# Altium PCB PCB1.PcbDoc
Units mm, origin at the board's own origin, x right, y up, seen from the top; angles counter-clockwise.
Board outline 72.9 x 53.34 mm, 2 copper layers (Top Layer, Bottom Layer); 7 components, 8 nets, 55 pads, 0 vias.
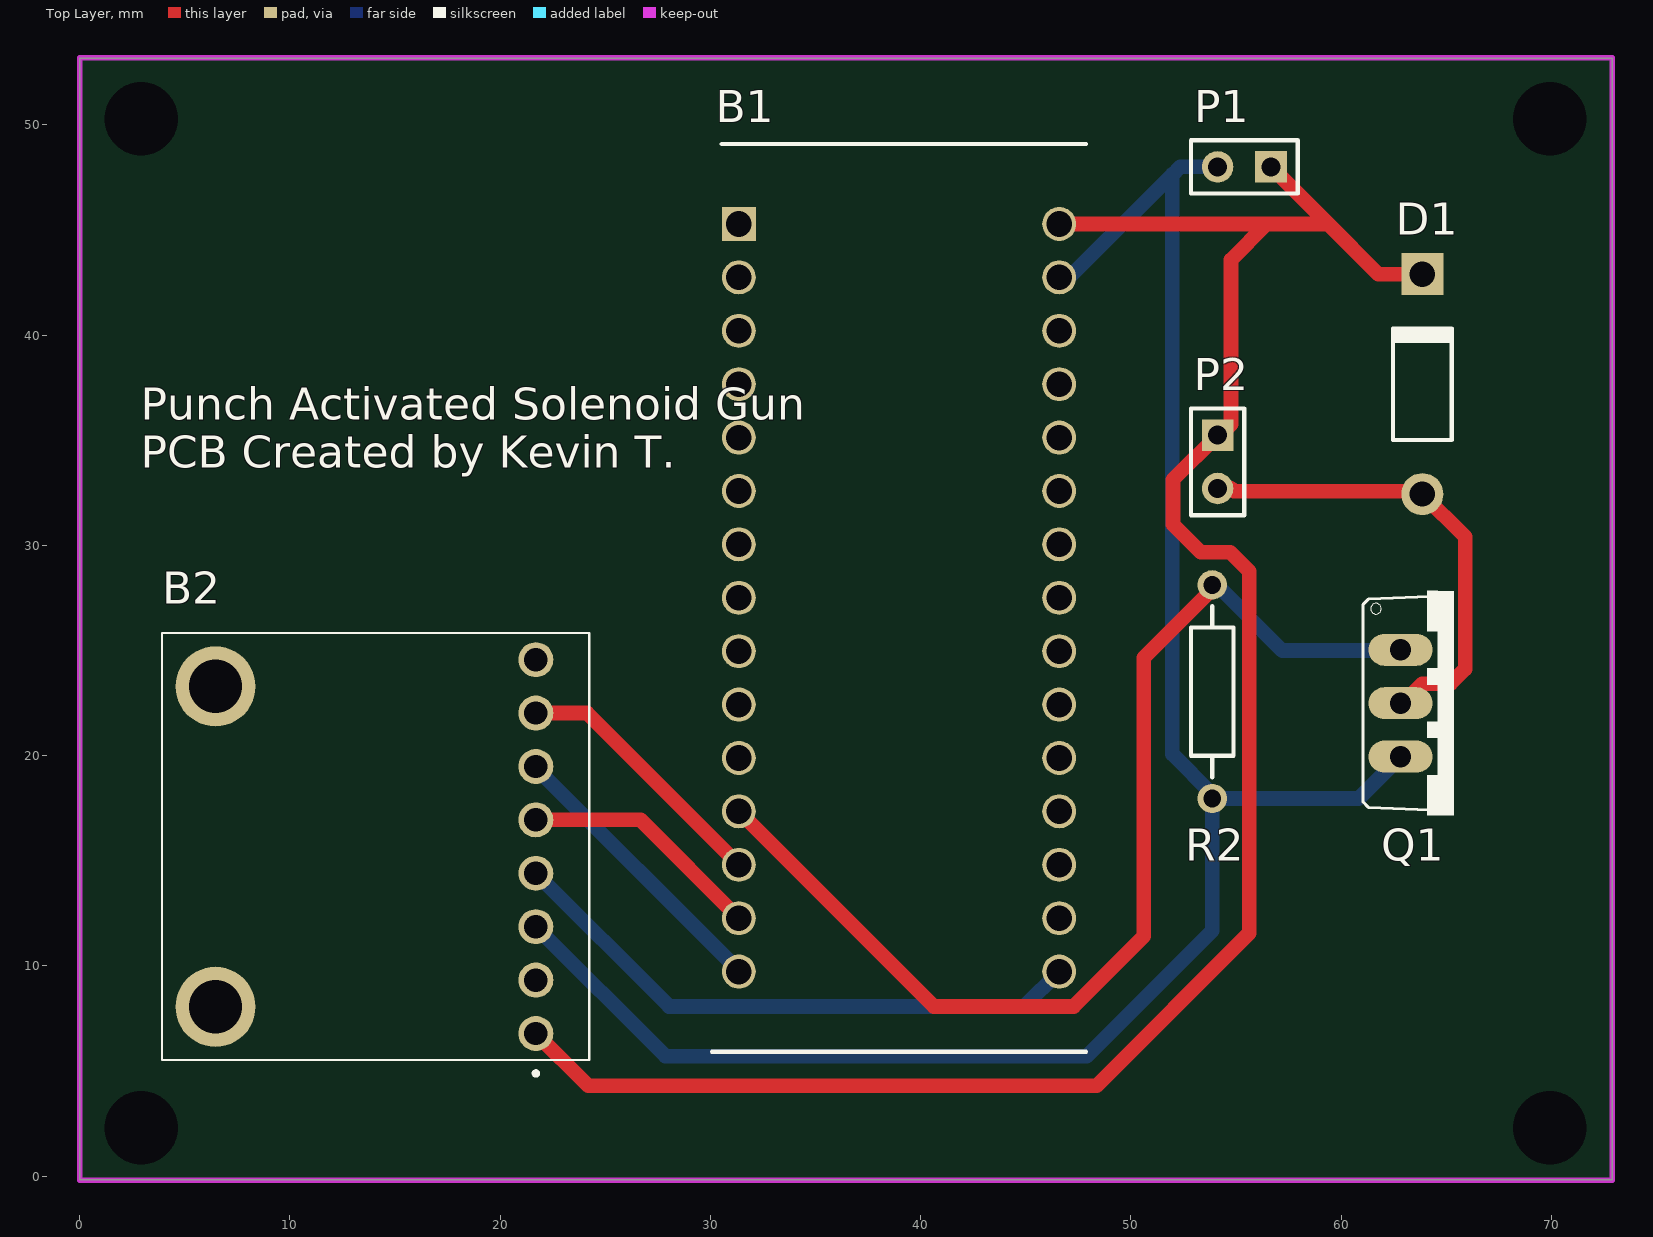
[diagram p0: Top Layer view]
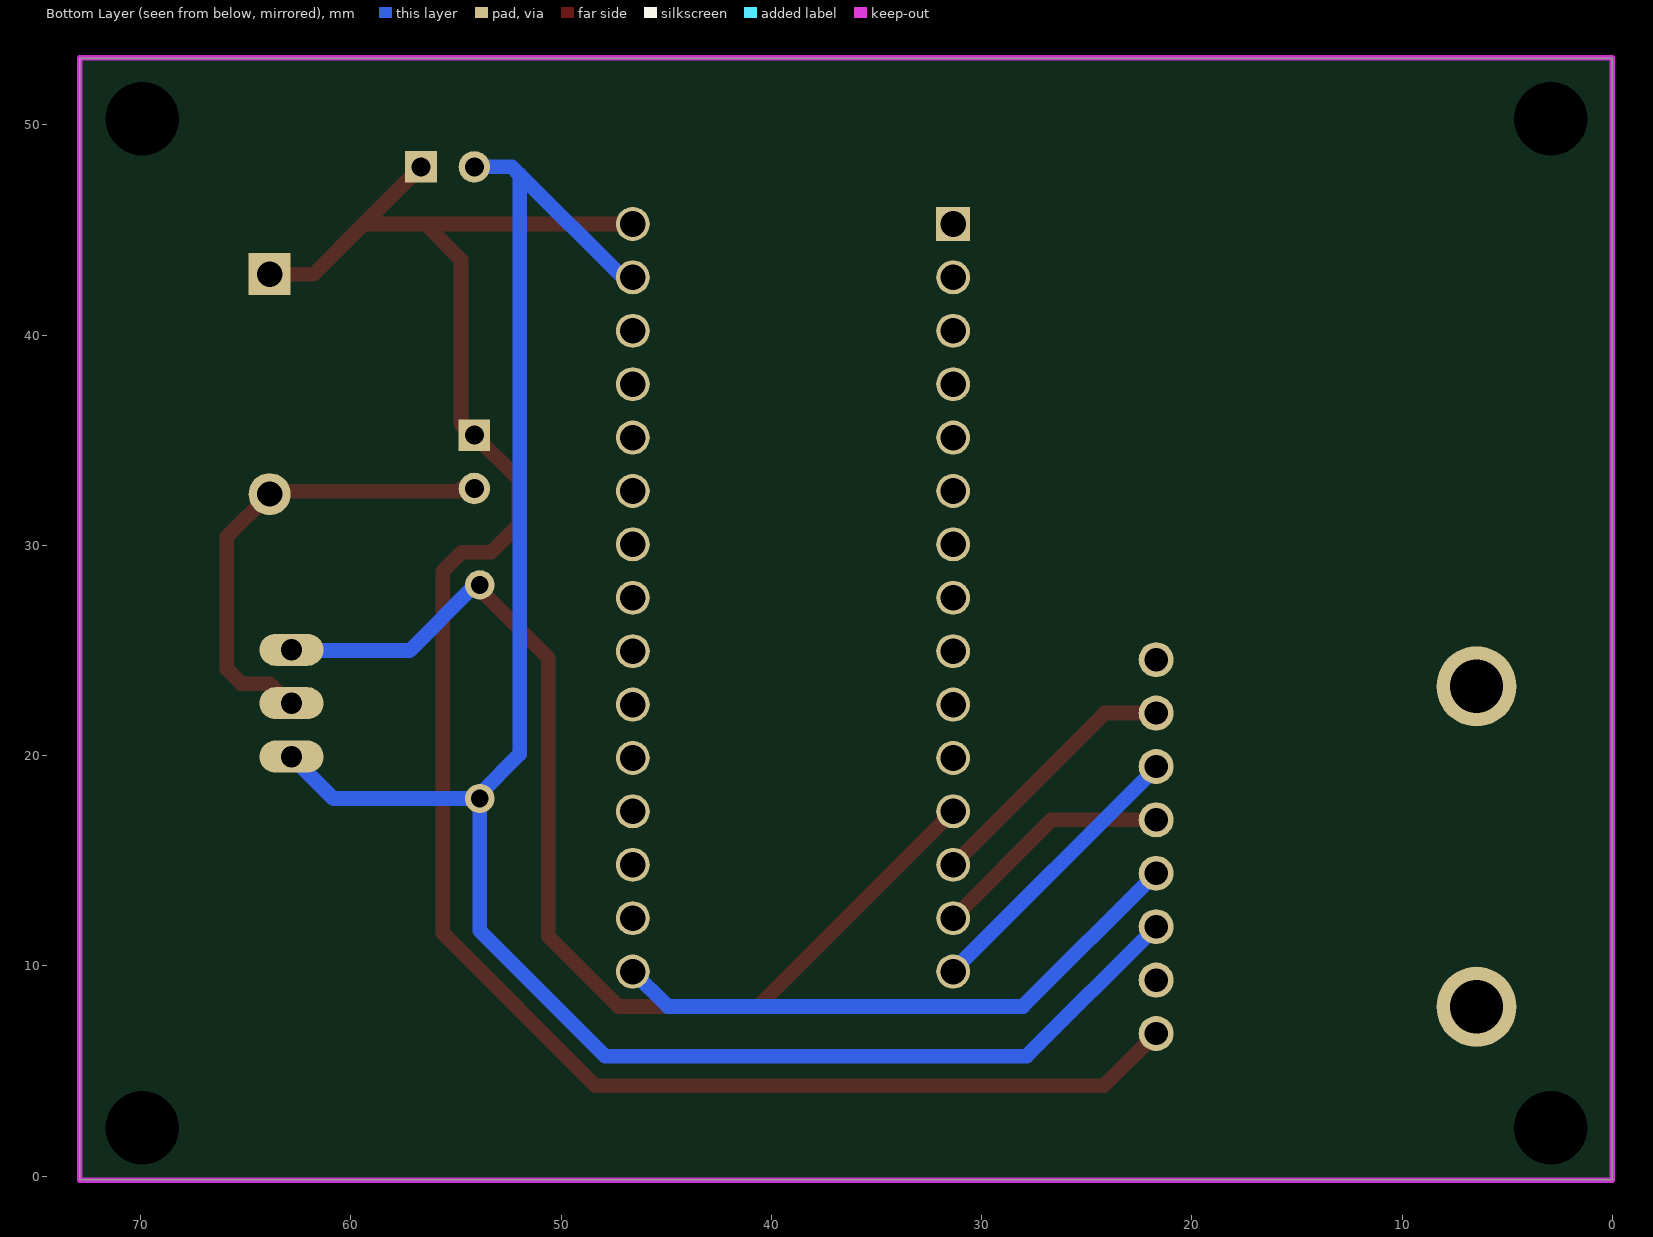
[diagram p1: Bottom Layer view, seen from below]

## Layer stack, top to bottom
Top Solder: solder mask 0.0102, Solder Resist, Dk 3.5
Top Layer: signal copper 0.0356
Dielectric 1: dielectric 0.32, FR-4, Dk 4.8
Bottom Layer: signal copper 0.0356
Bottom Solder: solder mask 0.0102, Solder Resist, Dk 3.5

## Board outline
0,-0.174 0,53.164 72.9,53.164 72.9,-0.174

## Design rules (kind name [scope] priority, off if disabled: settings)
Clearance [All] p1: gap=0.5 ignorepadtopadclearanceinfootprint=FALSE
HoleSize [All] p1: absolutevalues=TRUE maxlimit=10 minlimit=0.3 maxpercent=80.000 minpercent=20.000
PolygonConnect [All] p1: connectstyle=Relief reliefconductorwidth=0.5 reliefentries=4 polygonreliefangle="90 Angle" airgapwidth=0.5
RoutingVias [All] p1: holewidth=1 width=2.2 viastyle="Through Hole" minholewidth=0.6 minwidth=1.2 maxholewidth=0.7 maxwidth=1.7
SilkToSilkClearance [All] p1: silktosilkclearance=0.1
SilkToSolderMaskClearance [IsPad] p1: minsilkscreentomaskgap=0.1 clearancetoexposedcopper=TRUE
SolderMaskExpansion [All] p1: expansion=0.102
Width [All] p1: maxlimit=10 minlimit=0.5 preferedwidth=0.7
27 further rules are at their usual default settings.

## Components (designator, comment, footprint, x,y, rotation, side; value= is the part's Value field where it differs from the comment)
B1 "Nano" DIP1524W102P254L4318H762Q30N 38.972,27.51 r0 top
B2 "2809" 2809 21.7,6.786 r90 top
D1 "Diode 1N4007" DO-41 63.864,37.67 r90 top
P1 "LiPo Input" HDR1X2 56.664,48.005 r180 top
P2 "Solenoid Valve" HDR1X2 54.124,35.248 r270 top
Q1 "IRF520" TO220BV_IRF520(Primary) 65.364,22.494 r270 top
R2 "Res2" AXIAL-0.4 53.87,23.042 r90 top value=10K

## Footprints (in the part's own frame and the unit in brackets; to place one, negate y for a bottom-side part, rotate by r counter-clockwise, add the part's x,y. Pads: shape width x height; smd on the part's side, far side on the other; paste and mask are expansions set on the pad)
2809 [mm]
  round 1.665 hole 1.11: 1(0,0) 2(2.54,0) 3(5.08,0) 4(7.62,0) 5(10.16,0) 6(12.7,0) 7(15.24,0) 8(17.78,0)
  round 3.81 hole 2.54: MH1(1.27,15.24) MH2(16.51,15.24)
  silkscreen extent -2,-2.54 19.05,17.78, body extent -1.27,-2.54 19.05,17.78, height 5
AXIAL-0.4 [mm] "Axial Device, Thru-Hole; 2 Leads; 0.4 in Pin Spacing"
  round 1.4 hole 0.85: 1(-5.08,0) 2(5.08,0)
  silkscreen extent -4.06,-1.02 4.06,1.02
DIP1524W102P254L4318H762Q30N [mm]
  rect 1.616x1.616 / inner round 1.616 / far side rect 1.616x1.616 hole 1.216: 1(-7.62,17.78)
  round 1.616 hole 1.216: 2(-7.62,15.24) 3(-7.62,12.7) 4(-7.62,10.16) 5(-7.62,7.62) 6(-7.62,5.08) 7(-7.62,2.54) 8(-7.62,0) 9(-7.62,-2.54) 10(-7.62,-5.08) 11(-7.62,-7.62) 12(-7.62,-10.16) 13(-7.62,-12.7) 14(-7.62,-15.24) 15(-7.62,-17.78) 16(7.62,-17.78) 17(7.62,-15.24) 18(7.62,-12.7) 19(7.62,-10.16) 20(7.62,-7.62) 21(7.62,-5.08) 22(7.62,-2.54) 23(7.62,0) 24(7.62,2.54) 25(7.62,5.08) 26(7.62,7.62) 27(7.62,10.16) 28(7.62,12.7) 29(7.62,15.24) 30(7.62,17.78)
  silkscreen extent -8.89,-21.59 8.89,21.59, body extent -8.89,-21.46 8.89,21.72, height 7.62
DO-41 [mm] "Diode, Axial; Body 5.2 x 2.7 mm (LxDia. max), Lead Dia. 0.86 mm (max)"
  round 2 hole 1.2: 1(-5.23,0)
  rect 2x2 hole 1.2: 2(5.23,0)
  silkscreen extent -2.65,-1.4 2.75,1.4
HDR1X2 [mm] "Connector; Header; 2 Position"
  rect 1.5x1.5 hole 0.9: 1(0,0)
  round 1.5 hole 0.9: 2(2.54,0)
  silkscreen extent -1.27,-1.27 3.81,1.27
TO220BV_IRF520(Primary) [mil]
  oval 60x120 hole 40: D(0,-100) G(-100,-100) S(100,-100)
  silkscreen extent -210,-170 210,0

## Part data
B1: "Development Boards & Kits - AVR ARDUINO NANO V3 A000005", Manufacturer_Name=Arduino, Mouser Part Number=992-ARD-NANO30, RS Part Number=6961667, Allied_Number=70518857, Allied Price/Stock=http://www.alliedelec.com/arduino-a000005/70518857/, Datasheet Link=http://docs-emea.rs-online.com/webdocs/0db9/0900766b80db99cb.pdf, Geometry.Height=7.62mm, Manufacturer_Part_Number=Nano, Mouser Price/Stock=http://www.mouser.com/Search/ProductDetail.aspx?qs=Vxac6xGyzPmCaTfvE003gg%3d%3d, RS Price/Stock=http://uk.rs-online.com/web/p/products/6961667
B2: "Acceleration Sensor Development Tools Adafruit LIS3DH Triple-Axis Accelerometer (+-2g/4g/8g/16g)", Manufacturer_Name=Adafruit, Mouser Part Number=485-2809, Datasheet Link=http://www.mouser.com/datasheet/2/737/adafruit-lis3dh-triple-axis-accelerometer-breakout-780345.pdf, Geometry.Height=5mm, Manufacturer_Part_Number=2809, Mouser Price/Stock=https://www.mouser.com/Search/Refine.aspx?Keyword=485-2809
D1: "1 Amp General Purpose Rectifier", Code_JEDEC=DO-204-AL, ComponentLink1Description="Manufacturer Link", ComponentLink1URL=http://www.fairchildsemi.com/, ComponentLink2Description=Datasheet, ComponentLink2URL=http://www.fairchildsemi.com/ds/1N%2F1N4001.pdf, DatasheetVersion=1998, LatestRevisionDate=17-Jul-2002, LatestRevisionNote="Re-released for DXP Platform.", PackageDescription="Diode, Axial; Body 5.2 x 2.7 mm (LxDia. max), Lead Dia. 0.86 mm (max)", PackageReference=DO-41, PackageVersion=Aug-1999, Published=8-Jun-2000, Publisher="Altium Limited"
P1 P2: library part "Header 2", "Header, 2-Pin", LatestRevisionDate=17-Jul-2002, LatestRevisionNote="Re-released for DXP Platform.", Publisher="Altium Limited"
R2: "Resistor", LatestRevisionDate=17-Jul-2002, LatestRevisionNote="Re-released for DXP Platform.", PackageDescription="Axial Device, Thru-Hole; 2 Leads; 0.4 in Pin Spacing", PackageReference=AXIAL-0.4, Published=8-Jun-2000, Publisher="Altium Limited"

## Free pads (board coordinates)
  round 1.524 hole 3.5: 2(69.924,50.3) 3(69.924,2.3) 4(2.924,2.3) 5(2.924,50.3)

## Nets (pads, with @x,y where several pads share a name; then routed paths per layer and width w, separated by ;. In a path a pad name is that pad's centre, name@x,y a point inside that pad or via, vN(x,y) a via of type N, cw(c..) or ccw(c..) an arc to the next point about the centre after c; other vN are vias at no path point)
GND: B1.29 B2.3 P1.2 Q1.S R2.1 | length 93.5
  Bottom Layer w0.7: B2.3 27.866,5.7 47.9,5.7 53.87,11.67 R2.1 60.832,17.962 Q1.S ; B1.29 47.074,42.75 51.964,47.64 ; R2.1@53.9,18.147 51.964,20.083 51.964,47.614 52.355,48.005 P1.2 P1.2@53.971,48.158
NetB1_12: B1.12 Q1.G R2.2 | length 52.7
  Top Layer w0.7: B1.12 40.63,8.072 47.279,8.072 50.615,11.408 50.615,24.652 R2.2@54.085,28.122
  Bottom Layer w0.7: R2.2@54.085,28.122 57.207,25 Q1.G@62.824,25
NetB1_13: B1.13 B2.7 | length 12.6
  Top Layer w0.7: B2.7 24.136,22.026 B1.13
NetB1_14: B1.14 B2.5 | length 11.6
  Top Layer w0.7: B2.5 26.676,16.946 B1.14
NetB1_15: B1.15 B2.6 | length 13.8
  Bottom Layer w0.7: B2.6 21.7,19.434 31.352,9.782 B1.15
NetB1_16: B1.16 B2.4 | length 28.2
  Bottom Layer w0.7: B2.4 28.034,8.072 44.934,8.072 B1.16
NetB1_30: B1.30 B2.1 D1.2 P1.1 P2.1 | length 97.9
  Top Layer w0.7: B2.1 24.186,4.3 48.369,4.3 55.635,11.566 55.635,27.48 55.635,28.764 54.727,29.672 53.328,29.672 52,31 52,33.124 P2.1 ; B1.30 56.464,45.29 ; P2.1@54.252,35.248 54.764,35.761 54.764,43.59 56.464,45.29 ; P1.1 59.329,45.34 ; D1.2 61.769,42.9 59.329,45.34 ; 56.464,45.29 59.279,45.29 59.329,45.34
NetD1_1: D1.1 P2.2 Q1.D | length 22.1
  Top Layer w0.7: P2.2@54.764,32.708 54.898,32.574 63.73,32.574 D1.1 65.9,30.404 65.9,24.124 65.198,23.422 63.87,23.422 62.942,22.494 Q1.D
pads on no net: B1.1 B1.2 B1.3 B1.4 B1.5 B1.6 B1.7 B1.8 B1.9 B1.10 B1.11 B1.17 B1.18 B1.19 B1.20 B1.21 B1.22 B1.23 B1.24 B1.25 B1.26 B1.27 B1.28 B2.2 B2.8 B2.MH1 B2.MH2

## Keep-outs
Keep-Out Layer:
  lines w0.254: 0,-0.2 0,0 0,53.2 72.9,53.2 72.9,-0.2 0,-0.2

## Silkscreen, mask and mechanical layers (free items; w line width, h text height)
Top Overlay:
  text "Punch Activated Solenoid Gun / PCB Created by Kevin T." at 2.9,33.7 h1.52